# Altium PCB AuxTester.PcbDoc
Units mil, origin at the board's own origin, x right, y up, seen from the top; angles counter-clockwise.
Board outline 2945 x 2359 mil, 2 copper layers (Top Layer, Bottom Layer); 40 components, 34 nets, 175 pads, 20 vias.
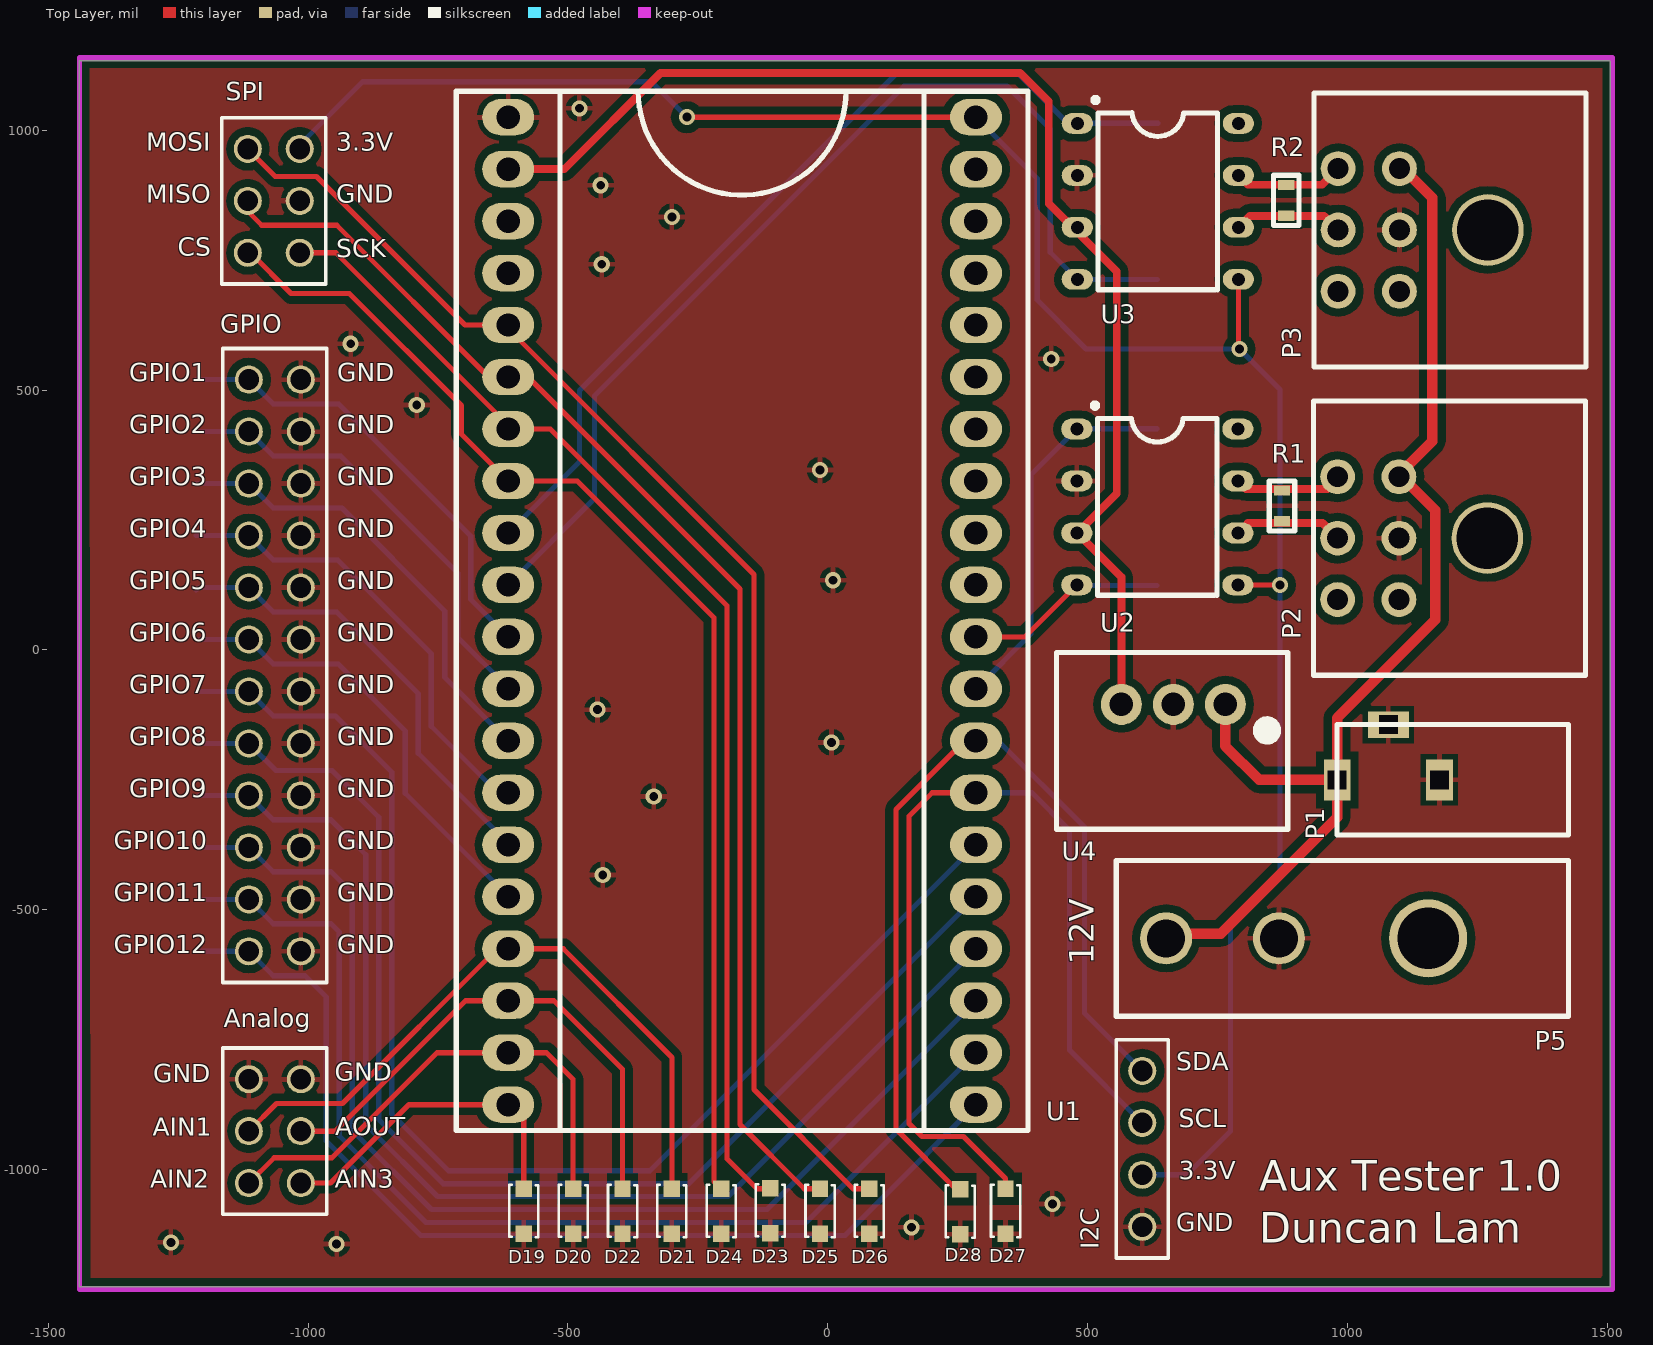
[diagram p0: Top Layer view]
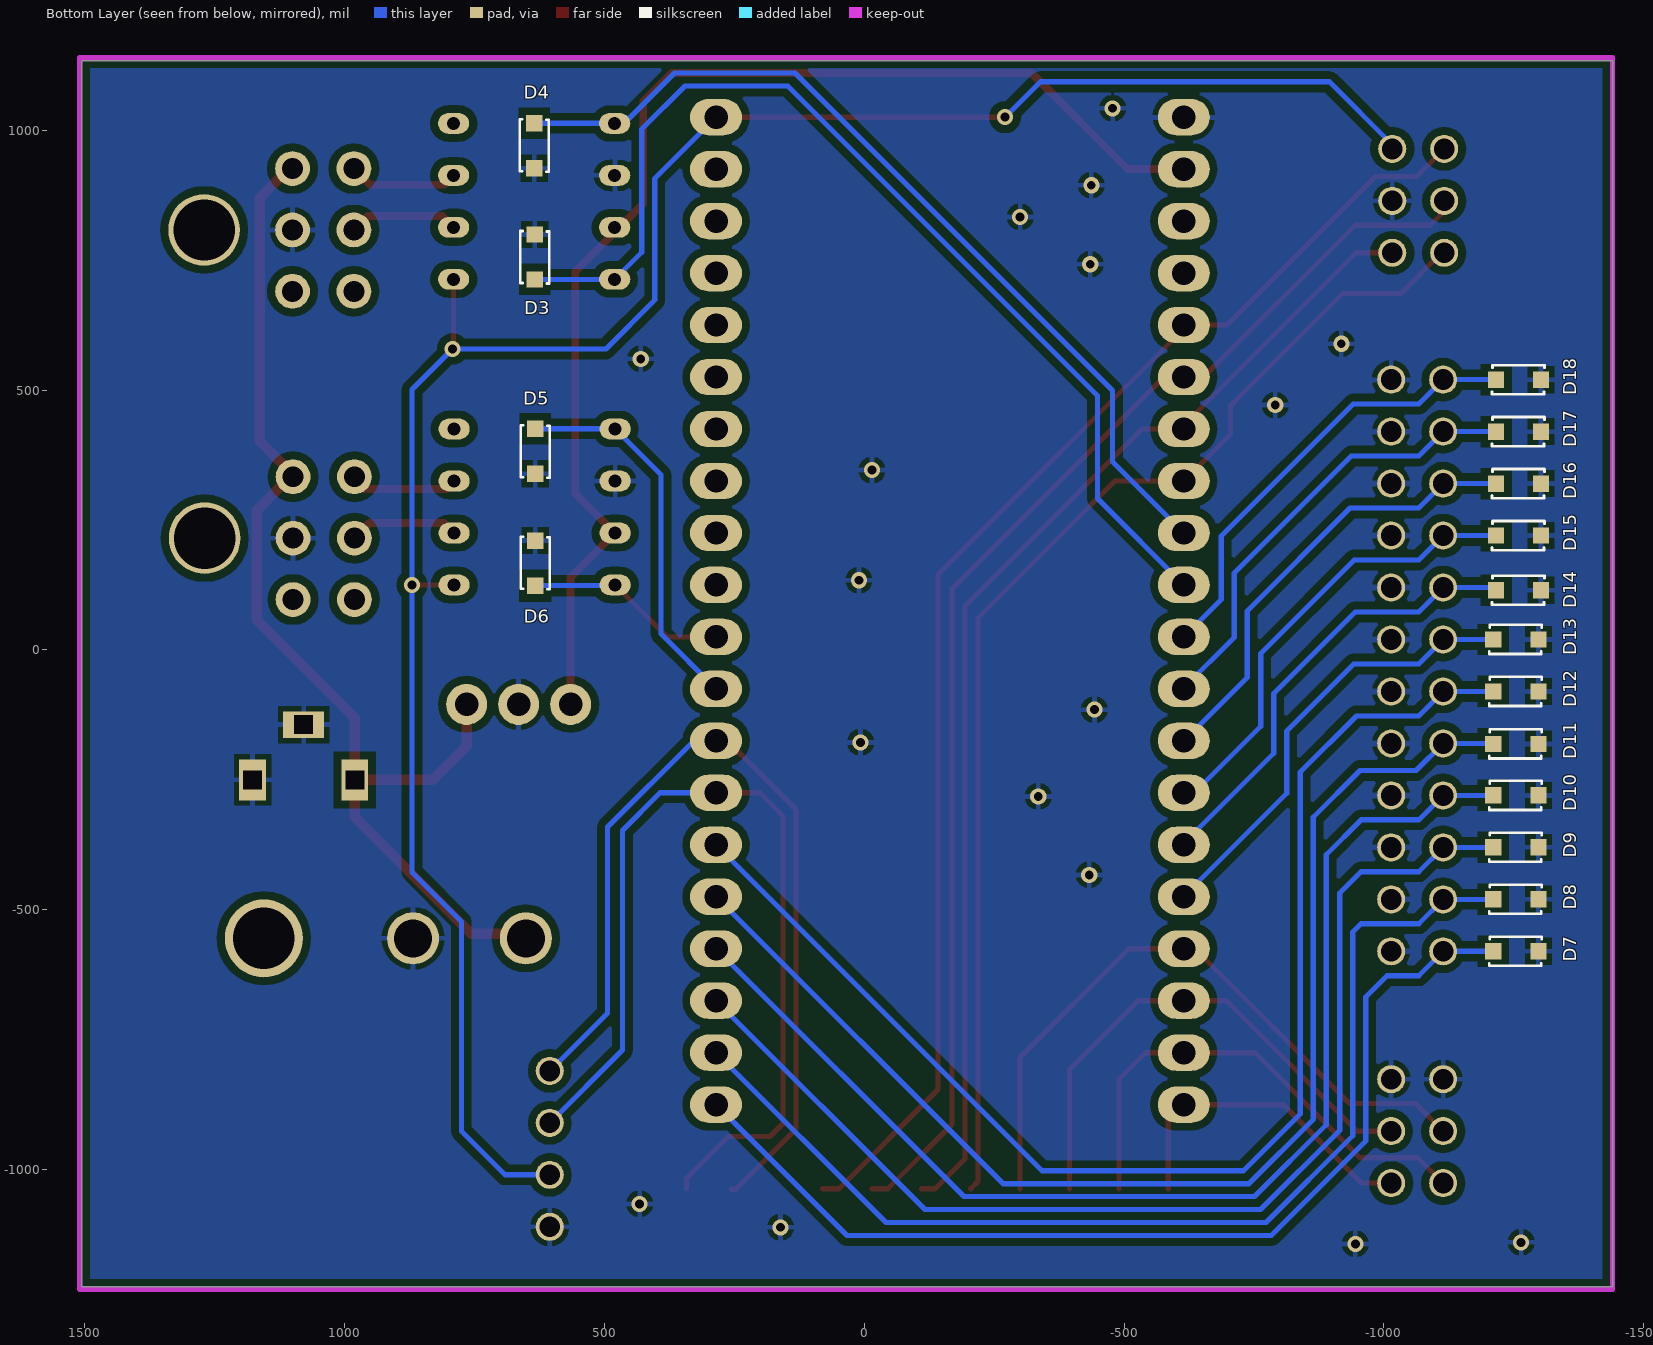
[diagram p1: Bottom Layer view, seen from below]
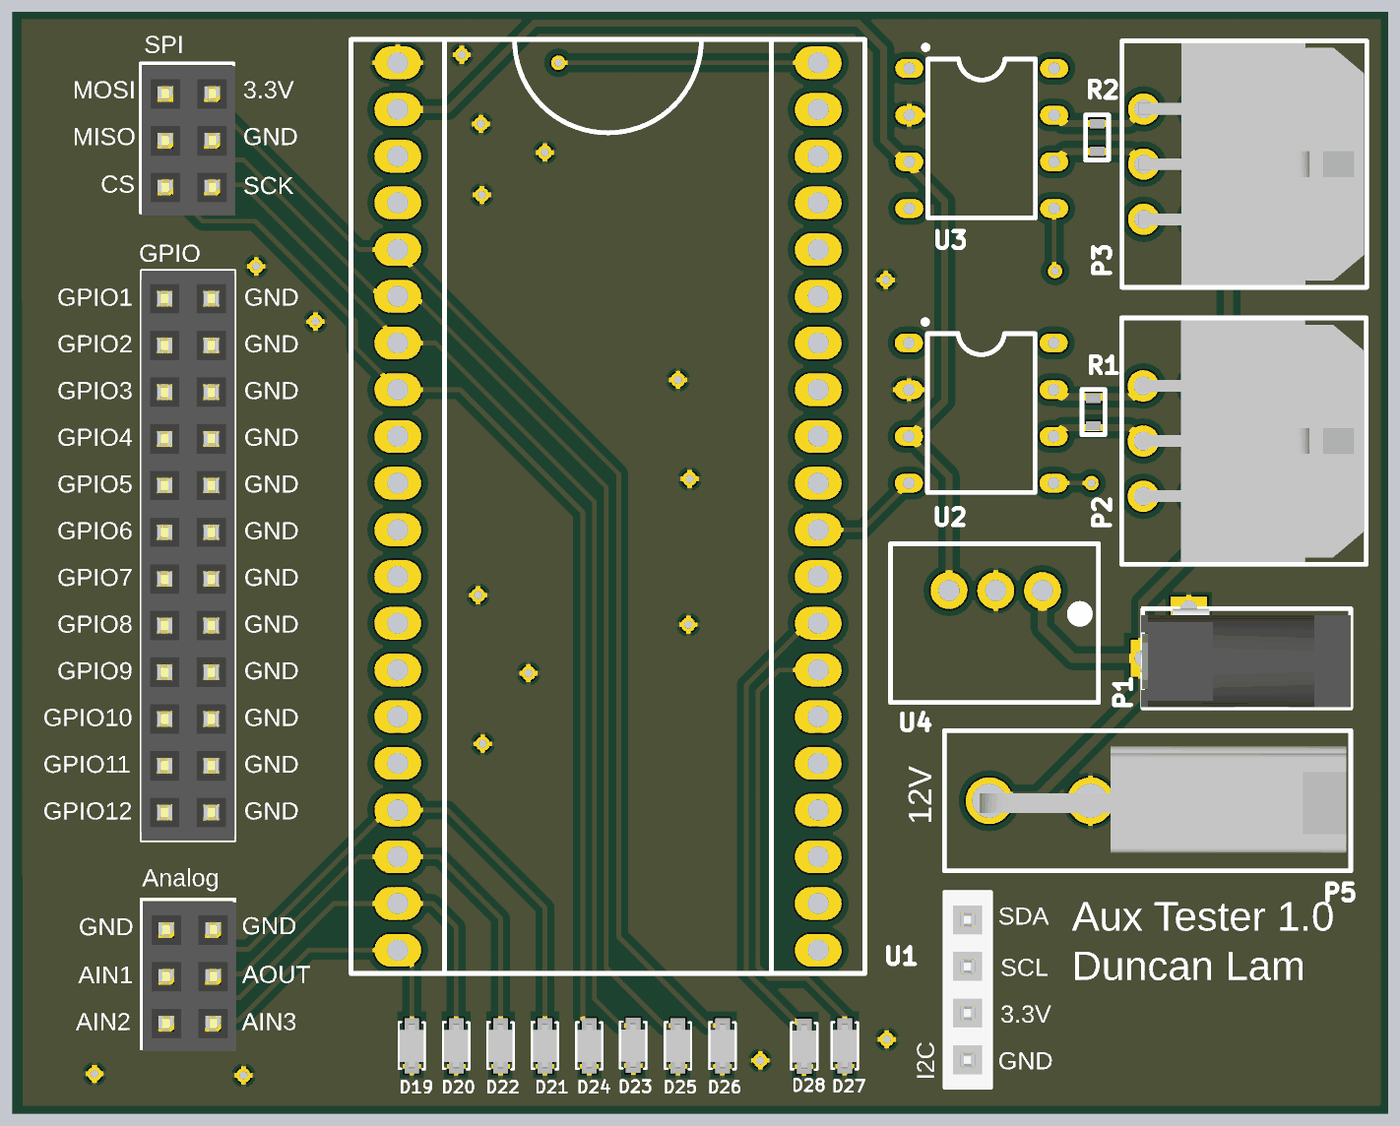
[diagram p2: 3D render of the assembled board from above, using the file's embedded part models]
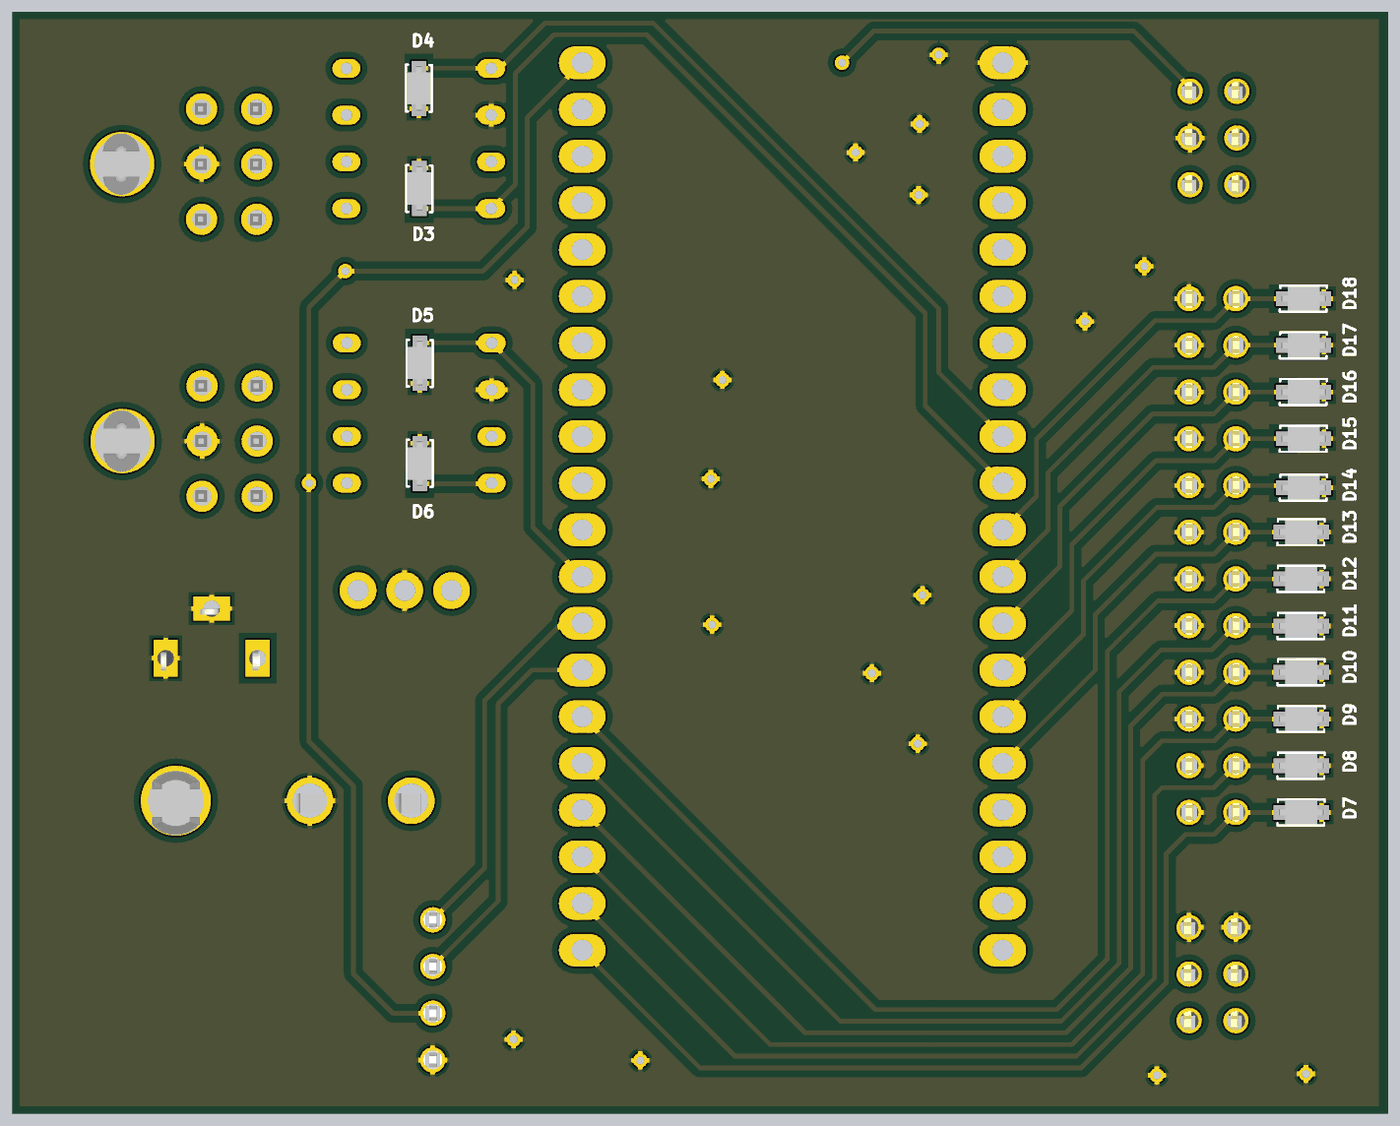
[diagram p3: 3D render of the assembled board from below, using the file's embedded part models]

## Layer stack, top to bottom
Top Solder: solder mask 0.4, Solder Resist, Dk 3.5
Top Layer: signal copper 1.4
Dielectric 1: dielectric 12.6, FR-4, Dk 4.8
Bottom Layer: signal copper 1.4
Bottom Solder: solder mask 0.4, Solder Resist, Dk 3.5

## Board outline
-1440,-1225 1505,-1225 1505,1134 -1440,1134

## Design rules (kind name [scope] priority, off if disabled: settings)
BoardOutlineClearance [All] p1: gap=15
Clearance [All] p1: gap=15
DiffPairsRouting [All] p1: maxlimit=10 minlimit=10 mostfreqgap=10 toplayer_minwidth=15 toplayer_maxwidth=15 toplayer_prefwidth=15 bottomlayer_minwidth=15 bottomlayer_maxwidth=15 bottomlayer_prefwidth=15 maxuncoupledlength=500
HoleSize [All] p1: absolutevalues=TRUE maxlimit=100 minlimit=13 maxpercent=80.000 minpercent=20.000
MinimumAnnularRing [All] p1: minimumring=7
PolygonConnect [All] p1: connectstyle=Relief reliefconductorwidth=10 reliefentries=4 polygonreliefangle="90 Angle" airgapwidth=10
RoutingVias [All] p1: holewidth=17 width=30 viastyle="Through Hole" minholewidth=13 minwidth=27 maxholewidth=28 maxwidth=50
SolderMaskExpansion [All] p1: expansion=4
Width Width_2 [InNet('5V')] p1: maxlimit=15 minlimit=15 preferedwidth=15
Width Width_1 [InNet('12V')] p2: maxlimit=20 minlimit=20 preferedwidth=20
Width [All] p3: maxlimit=20 minlimit=7 preferedwidth=10
28 further rules are at their usual default settings.

## Classes and differential pairs
component class Connectors: Analog D7 D8 D9 D10 D11 D12 D13 D14 D15 D16 D17 D18 D19 D20 D21 D22 D23 D24 D25 D26 D27 D28 GPIO I2C P2 P3 SPI
component class MCU: D3 D4 D5 D6 R1 R2 U1 U2 U3
component class Power: P1 P5 U4
differential pair CAN1: +CAN1_P -CAN1_N
differential pair CAN2: +CAN2_P -CAN2_N

## Components (designator, comment, footprint, x,y, rotation, side; value= is the part's Value field where it differs from the comment)
Analog "Analog" "6-Pin Vertical Header" -1064,-926 r0 top (schematic designator P7)
D3 "TVS Diode" "TVS Diode" 634,756 r0 bottom
D4 "TVS Diode" "TVS Diode" 635,970 r180 bottom
D5 "TVS Diode" "TVS Diode" 633,382 r0 bottom
D6 "TVS Diode" "TVS Diode" 633,167 r180 bottom
D7 "TVS Diode" "TVS Diode" -1254,-580 r90 bottom
D8 "TVS Diode" "TVS Diode" -1254,-480 r90 bottom
D9 "TVS Diode" "TVS Diode" -1254,-380 r90 bottom
D10 "TVS Diode" "TVS Diode" -1254,-280 r90 bottom
D11 "TVS Diode" "TVS Diode" -1254,-181 r90 bottom
D12 "TVS Diode" "TVS Diode" -1254,-80 r90 bottom
D13 "TVS Diode" "TVS Diode" -1254,20 r90 bottom
D14 "TVS Diode" "TVS Diode" -1259,115 r90 bottom
D15 "TVS Diode" "TVS Diode" -1259,220 r90 bottom
D16 "TVS Diode" "TVS Diode" -1259,320 r90 bottom
D17 "TVS Diode" "TVS Diode" -1259,420 r90 bottom
D18 "TVS Diode" "TVS Diode" -1259,520 r90 bottom
D19 "TVS Diode" "TVS Diode" -585,-1080 r0 top
D20 "TVS Diode" "TVS Diode" -490,-1080 r0 top
D21 "TVS Diode" "TVS Diode" -300,-1080 r0 top
D22 "TVS Diode" "TVS Diode" -395,-1080 r0 top
D23 "TVS Diode" "TVS Diode" -111,-1079 r0 top
D24 "TVS Diode" "TVS Diode" -205,-1080 r0 top
D25 "TVS Diode" "TVS Diode" -15,-1080 r0 top
D26 "TVS Diode" "TVS Diode" 80,-1080 r0 top
D27 "TVS Diode" "TVS Diode" 342,-1080 r0 top
D28 "TVS Diode" "TVS Diode" 255,-1081 r0 top
GPIO "24-Pin Vertical Header" "24-Pin Vertical Header" -1064,-80 r0 top (schematic designator P6)
I2C "I2C" "4-Pin Vertical Header" 605,-960 r0 top (schematic designator P9)
P1 "PJ-007" "BARREL JACK PJ007" 980,-250 r180 top
P2 "SCH_MLX_MICROFIT_3X2" PCB_MLX_MICROFIT_3X2 1269,215 r90 top
P3 "SCH_MLX_MICROFIT_3X2" PCB_MLX_MICROFIT_3X2 1270,808 r90 top
P5 "12V Lights" "Molex Mini-Fit Jr 2x1" 1155,-555 r90 top
R1 "120" PCB_GENERIC_SMD_0603 874,277 r270 top
R2 "120" PCB_GENERIC_SMD_0603 882,865 r270 top
SPI "SPI" "6-Pin Vertical Header" -1066,864 r0 top (schematic designator P8)
U1 "LPC1768 mbed" "LPC 1768 mbed Layout" -165,75 r0 top
U2 "MCP2562" MCP2562 634,275 r0 top
U3 "MCP2562" MCP2562 635,863 r0 top
U4 "R78E-1.0 DC/DC" R78-1.0 665,-105 r180 top

## Footprints (in the part's own frame and the unit in brackets; to place one, negate y for a bottom-side part, rotate by r counter-clockwise, add the part's x,y. Pads: shape width x height; smd on the part's side, far side on the other; paste and mask are expansions set on the pad)
"4-Pin Vertical Header" [mil]
  round 54 hole 40: 1(0,150) 2(0,50) 3(0,-50) 4(0,-150)
  silkscreen extent -50,-210 50,210, body extent -50,-210 50,210, height 335
"6-Pin Vertical Header" [mil]
  round 54 hole 40: 1(-50,100) 2(-50,0) 3(-50,-100) 4(50,-100) 5(50,0) 6(50,100)
  silkscreen extent -100,-160 100,160, body extent -100,-160 100,160, height 338
"24-Pin Vertical Header" [mil]
  round 54 hole 40: 1(-50,600) 2(-50,500) 3(-50,400) 4(-50,300) 5(-50,200) 6(-50,100) 7(-50,0) 8(-50,-100) 9(-50,-200) 10(-50,-300) 11(-50,-400) 12(-50,-500) 13(50,-500) 14(50,-400) 15(50,-300) 16(50,-200) 17(50,-100) 18(50,0) 19(50,100) 20(50,200) 21(50,300) 22(50,400) 23(50,500) 24(50,600)
  silkscreen extent -100,-560 100,660, body extent -100,-560 100,660, height 338
"BARREL JACK PJ007" [mm] "Pin connections for Barrel Jack"
  rect 1.3x2 hole 0.9 square: 1(0,0) 2(-5,0)
  rect 2x1.3 hole 0.9 square: 3(-2.5,-2.7)
  silkscreen extent -11.3,-2.7 0,2.7, body extent -11.31,-2.68 0.14,2.67, height 7.4
"LPC 1768 mbed Layout" [mil]
  oval 100x70 hole 45: 1(-450,950) 2(-450,850) 3(-450,750) 4(-450,650) 5(-450,550) 6(-450,450) 7(-450,350) 8(-450,250) 9(-450,150) 10(-450,50) 11(-450,-50) 12(-450,-150) 13(-450,-250) 14(-450,-350) 15(-450,-450) 16(-450,-550) 17(-450,-650) 18(-450,-750) 19(-450,-850) 20(-450,-950) 21(450,-950) 22(450,-850) 23(450,-750) 24(450,-650) 25(450,-550) 26(450,-450) 27(450,-350) 28(450,-250) 29(450,-150) 30(450,-50) 31(450,50) 32(450,150) 33(450,250) 34(450,350) 35(450,450) 36(450,550) 37(450,650) 38(450,750) 39(450,850) 40(450,950)
  silkscreen extent -550,-1000 550,1000, body extent -545,-990 545,1000, height 260
MCP2562 [mil]
  oval 60x40 hole 25: 1(-155,150) 2(-155,50) 3(-155,-50) 4(-155,-150) 5(155,-150) 6(155,-50) 7(155,50) 8(155,150)
  silkscreen extent -125,-170 115,200, body extent -115,-170 115,170, height 210
"Molex Mini-Fit Jr 2x1" [mil]
  round 100 hole 73: 1(0,287) 2(0,504)
  round 150 hole 118: ""(0,0)
  silkscreen extent -150,-270 150,600, body extent -111,-260 117,525, height 449
PCB_GENERIC_SMD_0603 [mm]
  rect 0.5x0.8 smd: 1(-0.75,0) 2(0.75,0)
  silkscreen extent -1.22,-0.63 1.22,0.63, body extent -0.75,-0.5 0.75,0.5, height 0.45
PCB_MLX_MICROFIT_3X2 [mm]
  round 1.7 hole 1.02: 1(3,4.32) 2(0,4.32) 3(-3,4.32) 4(3,7.32) 5(0,7.32) 6(-3,7.32)
  round 3.5 hole 3: ""(0,0)
  silkscreen extent -6.7,-4.8 6.7,8.5, body extent -6.57,-4.65 6.58,7.59, height 8.83
R78-1.0 [mm]
  round 2 hole 1.15: 1(-2.54,0) 2(0,0) 3(2.54,0)
  silkscreen extent -5.59,-2.54 5.71,6.1, body extent -4.44,-1.59 4.45,5.4, height 10.4
"TVS Diode" [mm]
  rect 0.8x0.8 smd: 1(0,1.1) 2(0,-1.1)
  silkscreen extent -0.71,-1.27 0.71,1.3, body extent -0.65,-1.27 0.65,1.27, height 1.04

## Part data
Analog SPI: library part "6-Pin Vertical Header"
I2C: library part "4-Pin Vertical Header"
P1: library part Component_1
P5: library part "Molex Mini-Fit 1x2"
R1 R2: library part SCH_GENERIC_RESISTOR_0603, "120 Ohms"
U4: library part R78E-1.0

## Via types
v1: diameter 31, hole 17, Top Layer to Bottom Layer, 20 vias

## Nets (pads, with @x,y where several pads share a name; then routed paths per layer and width w, separated by ;. In a path a pad name is that pad's centre, name@x,y a point inside that pad or via, vN(x,y) a via of type N, cw(c..) or ccw(c..) an arc to the next point about the centre after c; other vN are vias at no path point)
3.3V: I2C.3 SPI.6 U1.40 U2.5 U3.5 | length 4213.4
  Top Layer w10: v1(-271,1025) U1.40 ; U2.5 v1(870,125) ; U3.5 790,581 v1(792,579)
  Bottom Layer w10: SPI.6 -1016,972 -895,1093 -339,1093 v1(-271,1025) ; U1.40 403,907 403,673 497,579 v1(792,579) 870,501 v1(870,125) 870,-428.01 775,-523.01 775,-926 691,-1010 I2C.3
5V: U1.2 U2.3 U3.3 U4.3 | length 2420.4
  Top Layer w15: U1.2 -507,925 -322,1110 370,1110 425,1055 425,859 556,728 556,301 480,225 565,140 U4.3
12V: P1.1 P2.1 P3.1 P5.2 U4.1 | length 2161.7
  Top Layer w20: P5.2 660,-546 756,-546 980,-322 P1.1 ; U4.1 765,-185 830,-250 P1.1 ; P3.1@1099.92,933.11 1163,870.03 1163,401.19 1099.92,338.11 1169,269.03 1169,58 980,-131 P1.1
"ANALOG IN1": Analog.2 D21.1 U1.17 | length 1298.7
  Top Layer w10: Analog.2 -1061,-873 -934,-873 -636,-575 U1.17 -509,-575 -300,-784 D21.1
"ANALOG IN2": Analog.3 D20.1 U1.19 | length 959.8
  Top Layer w10: Analog.3 -1065,-977 -954,-977 -752,-775 U1.19 -541,-775 -490,-826 D20.1
"ANALOG IN3": Analog.4 D19.1 U1.20 | length 593.2
  Top Layer w10: Analog.4 -957,-1026 -806,-875 U1.20 ; D19.1 U1.20@-585,-905
"ANALOG OUT": Analog.5 D22.1 U1.18 | length 1007.3
  Top Layer w10: Analog.5 -948,-926 -697,-675 U1.18 -527,-675 -395,-807 D22.1
CAN1_N: P2.5 R1.2 U2.6 | length 210.3
  Top Layer w15: U2.6 U2.6@807,243 ; 808,244 951.81,244 P2.5
CAN1_P: P2.4 R1.1 U2.7 | length 210.5
  Top Layer w15: U2.7 804.47,309.53 961.53,309.53 980.81,328.81 P2.4
CAN2_N: P3.5 R2.2 U3.6 | length 212.1
  Top Layer w15: U3.6 812,835 954.81,835 P3.5
CAN2_P: P3.4 R2.1 U3.7 | length 212.2
  Top Layer w15: U3.7 808,895 950.7,895 P3.4
CS: D24.1 SPI.3 U1.8 | length 2324.5
  Top Layer w10: SPI.3 -1111,764 -1032.82,685.82 -920.82,685.82 -705,470 -705,415 U1.8 -482,325 -219,62 -219,-1022.69 D24.1
GND: Analog.1 Analog.6 D3.2 D4.2 D5.1 D6.1 D7.2 D8.2 D9.2 D10.2 D11.2 D12.2 D13.2 D14.2 D15.2 D16.2 D17.2 D18.2 D19.2 D20.2 D21.2 D22.2 D23.2 D24.2 D25.2 D26.2 D27.2 D28.2 GPIO.13 GPIO.14 GPIO.15 GPIO.16 GPIO.17 GPIO.18 GPIO.19 GPIO.20 GPIO.21 GPIO.22 GPIO.23 GPIO.24 I2C.4 P1.2 P1.3 P2.2 P3.2 P5.1 SPI.5 U1.1 U2.2 U3.2 U4.2
  other v1: -945,-1143 -1264,-1140 161,-1111 432,-1066 -433,-433 -335,-282 7,-178 -443,-115 10,134 -15,346 -791,471 430,560 -918,589 -435,742 -300,833 -437,894 -478,1042
GPIO1: D18.1 GPIO.1 U1.11 | length 877.2
  Bottom Layer w10: D18.1 GPIO.1 -1067,473 -941,473 -687,219 -687,97 U1.11
GPIO2: D17.1 GPIO.2 U1.12 | length 879.5
  Bottom Layer w10: D17.1 GPIO.2 -1067,373 -937,373 -712,148 -712,24 -615,-73 U1.12
GPIO3: D16.1 GPIO.3 U1.13 | length 880.7
  Bottom Layer w10: D16.1 GPIO.3 -1067,273 -935,273 -737,75 -737,-53 U1.13
GPIO4: D15.1 GPIO.4 U1.14 | length 867.7
  Bottom Layer w10: D15.1 GPIO.4 -1067,173 -943,173 -763,-7 -763,-147 U1.14@-635,-275
GPIO5: D14.1 GPIO.5 U1.15 | length 876.9
  Bottom Layer w10: D14.1 -1210.69,120 GPIO.5 -1067,73 -945,73 -788,-84 -788,-199 -615,-372 U1.15
GPIO6: D13.1 GPIO.6 U1.16 | length 871.6
  Bottom Layer w10: D13.1 GPIO.6 -1067,-27 -942,-27 -813,-156 -813,-276 -615,-474 U1.16
GPIO7: D12.1 GPIO.7 U1.26 | length 2522.8
  Bottom Layer w10: D12.1 GPIO.7 -1067,-127 -947,-127 -839,-235 -839,-893 -730,-1002 -342,-1002 U1.26
GPIO8: D11.1 GPIO.8 U1.25 | length 2416.1
  Bottom Layer w10: D11.1 -1209.69,-180 GPIO.8 -1062,-232 -954,-232 -864,-322 -864,-903.36 -740.36,-1027 -267,-1027 U1.25
GPIO9: D10.1 GPIO.9 U1.24 | length 2317.5
  Bottom Layer w10: D10.1 GPIO.9 -1067,-327 -956,-327 -889,-394 -889,-913.71 -750.71,-1052 -192,-1052 U1.24
GPIO10: D9.1 GPIO.10 U1.23 | length 2218.3
  Bottom Layer w10: D9.1 GPIO.10 -1067,-427 -956,-427 -915,-468 -915,-924.48 -762.48,-1077 -117,-1077 U1.23
GPIO11: D8.1 GPIO.11 U1.22 | length 2118.3
  Bottom Layer w10: D8.1 GPIO.11 -1067,-527 -956,-527 -940,-543 -940,-934.84 -772.84,-1102 -42,-1102 U1.22
GPIO12: D7.1 GPIO.12 U1.21 | length 1989
  Bottom Layer w10: D7.1 GPIO.12 -1067,-627 -1006,-627 -965,-668 -965,-945.19 -783.19,-1127 33,-1127 U1.21
"I2C SCL": D27.1 I2C.2 U1.27 | length 1818.8
  Top Layer w10: U1.27 201,-275 156,-320 156,-911 181,-936 261,-936 342,-1017 D27.1
  Bottom Layer w10: U1.27 392.64,-275 465,-347.36 465,-770 I2C.2
"I2C SDA": D28.1 I2C.1 U1.28 | length 1788.2
  Top Layer w10: D28.1 246.85,-1037.69 131,-921.84 131,-307 263,-175 U1.28
  Bottom Layer w10: U1.28 328,-175 494,-341 494,-699 I2C.1
MISO: D25.1 SPI.2 U1.6 | length 2503.4
  Top Layer w10: SPI.2 -1116,844 -1089,817 -945,817 -653,525 U1.6 -577,525 -169,117 -169,-913 -45.31,-1036.69 D25.1
MOSI: D26.1 SPI.1 U1.5 | length 2609.3
  Top Layer w10: SPI.1 -1063,911 -984,911 -698,625 U1.5 -615,617.78 -142,144.78 -142,-846 48.69,-1036.69 D26.1
NetD3_1: D3.1 U1.10 U3.4 | length 2055.2
  Bottom Layer w10: U1.10 -449,291 -449,489 147,1085 345,1085 428,1002 428,765 U3.4 ; U3.4@480.31,712.69 D3.1
NetD4_1: D4.1 U1.9 U3.1 | length 1736.7
  Bottom Layer w10: U1.9 -478,362 -478,499 133,1110 365,1110 462,1013 U3.1 ; U3.1@480.31,1013.31 D4.1
NetD5_2: D5.2 U1.29 U2.1 | length 734.1
  Bottom Layer w10: U1.29 391,31 391,337 U2.1 ; U2.1@479.31,425.31 D5.2
NetD6_2: D6.2 U1.30 U2.4 | length 388.1
  Top Layer w10: U1.30 379,25 U2.4
  Bottom Layer w10: U2.4@480.31,123.69 D6.2
SCK: D23.1 SPI.4 U1.7 | length 2279.4
  Top Layer w10: SPI.4 -946.78,764 -615,432.22 U1.7 -534,425 -194,85 -194,-979 -136.31,-1036.69 D23.1@-110,-1036.69
pads on no net: P2. P2.3 P2.6 P3. P3.3 P3.6 P5. U1.3 U1.4 U1.31 U1.32 U1.33 U1.34 U1.35 U1.36 U1.37 U1.38 U1.39 U2.8 U3.8

## Polygon pours and split planes (outlines as drawn)
GND on Top Layer "GND_top" (solid, remove dead copper, pour order 0): -1420,1124 1494,1124 1494,-1215 1487,-1208 -1418,-1208
GND on Bottom Layer "GND_bottom" (solid, remove dead copper, pour order 2): -1424.41,1121.41 1489.59,1121.41 1489.59,-1217.59 1482.59,-1210.59 -1422.41,-1210.59

## Keep-outs
Keep-Out Layer:
  lines w10: -1440,-1230 -1440,1140 1510,1140 1510,-1230 -1440,-1230

## Silkscreen, mask and mechanical layers (free items; w line width, h text height)
Top Overlay:
  text "MOSI" at -1311,949 h60
  text "3.3V" at -946,949 h60
  text "MISO" at -1311,849 h60
  text "GND" at -946,849 h60
  text "CS" at -1251,747 h60
  text "SCK" at -946,744 h60
  text "GPIO1" at -1344,505 h60
  text "GND" at -944,505 h60
  text "GPIO2" at -1344,405 h60
  text "GND" at -944,405 h60
  text "GPIO3" at -1344,305 h60
  text "GND" at -944,305 h60
  text "GPIO4" at -1344,205 h60
  text "GND" at -944,205 h60
  text "GPIO5" at -1344,105 h60
  text "GND" at -944,105 h60
  text "GPIO6" at -1344,5 h60
  text "GND" at -944,5 h60
  text "GPIO7" at -1344,-95 h60
  text "GND" at -944,-95 h60
  text "GPIO8" at -1344,-195 h60
  text "GND" at -944,-195 h60
  text "GPIO9" at -1344,-295 h60
  text "GND" at -944,-295 h60
  text "GPIO10" at -1374,-395 h60
  text "GND" at -944,-395 h60
  text "GPIO11" at -1374,-495 h60
  text "GND" at -944,-495 h60
  text "GPIO12" at -1374,-595 h60
  text "GND" at -944,-595 h60
  text "12V" at 527,-606 h80 r90
  text "SDA" at 670,-820 h60
  text "GND" at -949,-841 h60
  text "GND" at -1298,-843 h60
  text "SCL" at 675,-930 h60
  text "AOUT" at -948,-945 h60
  text "AIN1" at -1299,-946 h60
  text "3.3V" at 675,-1030 h60
  text "AIN2" at -1304,-1046 h60
  text "AIN3" at -949,-1046 h60
  text "GND" at 670,-1130 h60
  text "Aux Tester 1.0 / Duncan Lam" at 830,-1160 h100